# EAGLE board charlie (EAGLE 6.4)
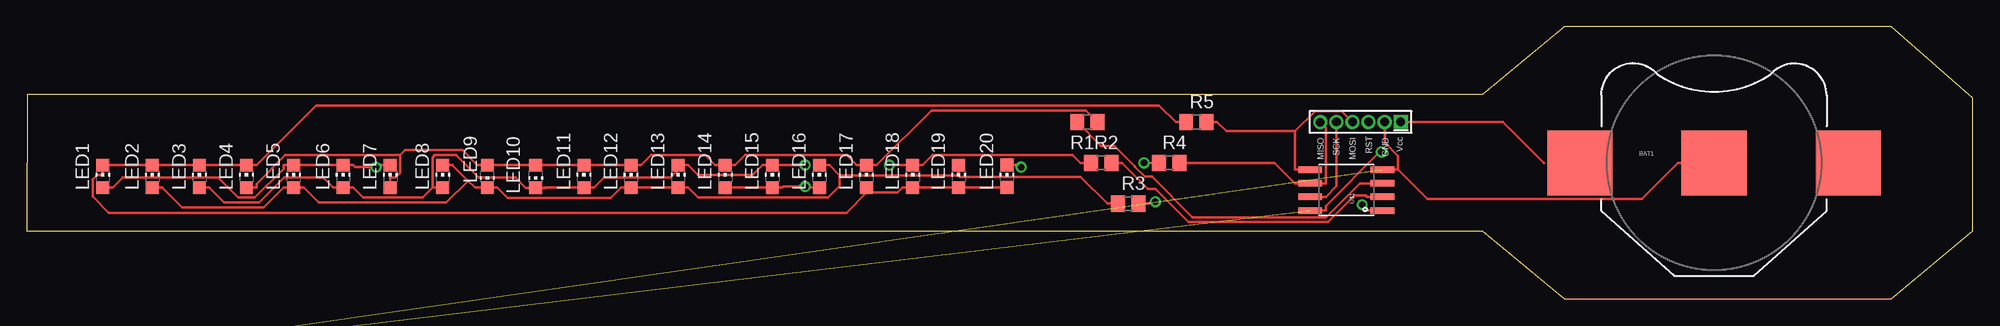
[diagram p0: board, top side]
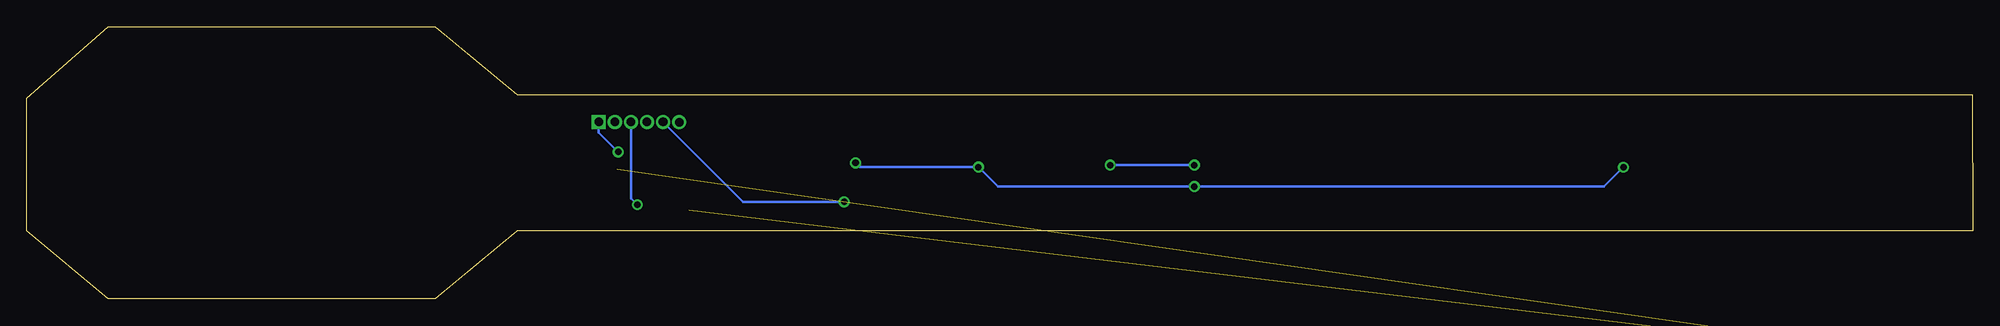
[diagram p1: board, bottom side, seen from below]

Size 181.41 x 25.4 mm. Coordinates in mm from the lower left corner, seen from the top.
Outline: 0,6.35 135.71,6.35 143.33,0 173.81,0 181.41,6.35 181.41,18.72 173.81,25.4 143.33,25.4 135.71,19.05 0.02,19.05 0,6.35
Copper layers (1*16): Top 0.035mm / dielectric 1.5mm / Bottom 0.035mm
Design rules "default": minimum track width 10mil, minimum drill 24mil, track to track 8mil, track to pad 8mil, pad to pad 8mil, via to via 8mil, smd to smd 8mil, copper to edge 40mil, drill to drill 8mil, minimum pad ring 10mil, minimum via ring 8mil, stop-mask expansion 4mil, vias tented up to drill 0mil, thermal gap 10mil

## Footprints (pad centres in the part's own frame; a part is rotated, then mirrored left to right if it is on the bottom)
BATTCON_20MM = smd 6.07 x 6.07: 1 -12.5,0; 2 0,0; 3 12.5,0
CHIP-LED0805 = smd 1.2 x 1.2: A 0,-1.05; C 0,1.05
SC75_INFINEON = smd 0.4 x 0.65: 1 -0.5,-0.575; 2 0,0.575; 3 0.5,-0.575
R0805 = smd 1.3 x 1.5: 1 -0.95,0; 2 0.95,0
SO08-EIAJ = smd 0.61 x 2.21: 1 -1.905,-3.378; 2 -0.635,-3.378; 3 0.635,-3.378; 4 1.905,-3.378; 5 1.905,3.353; 6 0.635,3.353; 7 -0.635,3.353; 8 -1.905,3.353
AVR_MINI_PROG = drill 0.8 pad 1.27 square: 1 0,0 | drill 0.8 pad 1.27: 2 1.5,0; 3 3,0; 4 4.5,0; 5 6,0; 6 7.5,0.01

## Placement (x,y rotation side)
BAT1  cr2032  [BATTCON_20MM]  157.3,12.7 0 top
LED1  [CHIP-LED0805]  7.08,11.43 0 top
LED2  [CHIP-LED0805]  11.7,11.43 0 top
LED3  [CHIP-LED0805]  16.09,11.43 0 top
LED4  [CHIP-LED0805]  20.48,11.43 0 top
LED5  [CHIP-LED0805]  24.87,11.43 0 top
LED6  [CHIP-LED0805]  29.49,11.43 0 top
LED7  [CHIP-LED0805]  33.88,11.43 0 top
LED8  [CHIP-LED0805]  38.77,11.43 0 top
LED9  [CHIP-LED0805]  42.94,11.43 180 top
LED10  [CHIP-LED0805]  47.44,11.42 180 top
LED11  [CHIP-LED0805]  51.94,11.43 0 top
LED12  [CHIP-LED0805]  56.33,11.43 0 top
LED13  [CHIP-LED0805]  60.72,11.43 0 top
LED14  [CHIP-LED0805]  65.11,11.43 0 top
LED15  [CHIP-LED0805]  69.5,11.43 0 top
LED16  [CHIP-LED0805]  73.89,11.43 0 top
LED17  [CHIP-LED0805]  78.28,11.43 0 top
LED18  [CHIP-LED0805]  82.59,11.43 0 top
LED19  [CHIP-LED0805]  86.87,11.43 0 top
LED20  [CHIP-LED0805]  91.38,11.44 0 top
Q1  BSA223SP  [SC75_INFINEON]  2.54,-5.23 0 top  (outside the outline)
R1  3  [R0805]  98.88,16.51 180 top
R2  3  [R0805]  100.15,12.7 0 top
R3  3  [R0805]  102.69,8.89 0 top
R4  3  [R0805]  106.5,12.7 0 top
R5  3  [R0805]  109.04,16.51 0 top
U$1  ATTINY45  [SO08-EIAJ]  123.01,10.16 90 top
U$3  AVR_MINI_PROGSMD  [AVR_MINI_PROG]  128.09,16.51 180 top

## Library data of the parts
BAT1 U$1 U$3 = SparkFun
LED1-LED20 = led
Q1 = transistor-fet
R1-R5 = rcl

## Nets
2.8V: Q1.3 U$1.8 U$3.1
GND: BAT1.2 Q1.1 U$1.4 U$3.2
LEDCONTROL0: LED1.C LED2.C LED3.C LED4.C LED17.A LED18.A LED19.A LED20.A R5.1
LEDCONTROL1: LED1.A LED5.C LED6.C LED7.C LED14.A LED15.A LED16.A LED20.C R4.1
LEDCONTROL2: LED2.A LED5.A LED8.C LED9.C LED12.A LED13.A LED16.C LED19.C R3.1
LEDCONTROL3: LED3.A LED6.A LED8.A LED10.C LED11.A LED13.C LED15.C LED18.C R2.1
LEDCONTROL4: LED4.A LED7.A LED9.A LED10.A LED11.C LED12.C LED14.C LED17.C R1.1
N$1: R5.2 U$1.5 U$3.4
N$2: R4.2 U$1.6 U$3.6
N$3: R3.2 U$1.7 U$3.5
N$4: R2.2 U$1.2
N$6: R1.2 U$1.3
N$7: BAT1.1
RESET: U$1.1 U$3.3

## Tracks (layer width: path | path; a pad name or v marks a point on that pad's centre or on a via)
2.8V  (via drill 0.61 pad 1.02)  (1 unrouted)
  Top 0.254: U$3.1 137.62,16.51 141.44,12.7 | U$1.8 121.09,8.25 121.09,8.7 126.11,13.72 v126.28,13.72
  Bottom 0.254: U$3.1 128.09,15.53 v126.28,13.72
GND  (1 unrouted)
  Top 0.254: 127.82,12.06 130.55,9.33 150.57,9.33 153.94,12.7 BAT1.2 | 127.82,12.06 127.82,13.36 126.59,14.59 U$3.2 | U$1.4 127.82,12.06
LEDCONTROL0
  Top 0.254: 78.28,9.91 76.41,8.04 7.66,8.04 6.15,9.55 6.15,11.13 6.57,11.55 7.08,11.55 LED1.C LED2.C LED3.C LED4.C 21.41,12.48 26.98,18.05 105.57,18.05 107.11,16.51 R5.1 | LED20.A 90.44,10.38 LED19.A LED18.A 81.66,10.38 81.19,9.91 78.28,9.91 | LED17.A 78.28,9.91
LEDCONTROL1  (via drill 0.61 pad 1.02)
  Top 0.254: LED7.C 32.95,12.48 32.76,12.29 v32.55,12.29 30.61,12.29 30.42,12.48 LED6.C LED5.C 23.94,12.48 23.94,12.13 21.26,9.45 19.72,9.45 17.86,11.31 8.94,11.31 8.01,10.38 LED1.A | LED14.A LED15.A 70.43,10.38 70.53,10.48 v72.56,10.48 72.86,10.48 72.96,10.38 LED16.A | LED20.C 91.84,12.48 92.31,12.48 92.49,12.3 v92.69,12.3 | R4.1 v104.15,12.7
  Bottom 0.254: v32.55,12.29 34.36,10.48 v72.56,10.48 90.87,10.48 v92.69,12.3 103.75,12.3 v104.15,12.7
LEDCONTROL2
  Top 0.254: 75.77,11.53 74.82,12.48 LED16.C | 86.87,11.53 75.77,11.53 | 75.77,11.53 75.77,10.54 74.67,9.45 62.58,9.45 61.65,10.38 LED13.A LED12.A 55.4,10.38 54.44,9.42 44.82,9.42 43.87,10.38 LED9.C 42.01,10.38 41.78,10.38 41.14,11.02 | 86.87,11.53 86.87,11.66 LED19.C | 86.87,11.53 87,11.4 98.25,11.4 100.76,8.89 R3.1 | 41.14,11.02 39.11,8.99 27.19,8.99 25.8,10.38 LED5.A 23.94,10.38 22.08,8.52 14.49,8.52 12.63,10.38 LED2.A | 41.14,11.02 39.7,12.46 39.7,12.48 LED8.C
LEDCONTROL3  (via drill 0.61 pad 1.02)
  Top 0.254: 61.19,12.48 60.02,11.31 53.8,11.31 52.87,10.38 LED11.A 48.38,10.38 48.37,10.38 47.91,10.38 LED10.C 46.51,10.38 45.57,11.31 42.11,11.31 40.01,13.41 38.03,13.41 37.84,13.22 37.84,10.38 | 61.19,12.48 61.65,12.48 62.58,11.55 67.64,11.55 68.57,12.48 LED15.C v72.56,12.48 | LED13.C 61.19,12.48 | R2.1 98.22,12.7 97.5,13.41 84.46,13.41 83.52,12.48 LED18.C v80.4,12.48 | 37.84,10.38 36.91,9.45 31.35,9.45 30.42,10.38 LED6.A 28.56,10.38 27.63,11.31 23.99,11.31 21.68,8.99 18.41,8.99 17.02,10.38 LED3.A | LED8.A 37.84,10.38
  Bottom 0.254: v80.4,12.48 v72.56,12.48
LEDCONTROL4
  Top 0.254: R1.1 98.75,17.59 84.32,17.59 79.21,12.48 LED17.C 77.35,12.48 76.42,13.41 66.97,13.41 66.04,12.48 LED14.C 64.18,12.48 63.25,13.41 58.19,13.41 57.26,12.48 LED12.C LED11.C 48.38,12.48 48.37,12.47 LED10.A 43.87,12.47 43.87,12.48 LED9.A 42.01,12.48 40.61,13.88 35.27,13.88 34.81,13.42 | 34.81,13.42 24.1,13.42 21.41,10.73 21.41,10.38 LED4.A | 34.81,13.42 34.81,11.73 34.39,11.31 33.88,11.31 LED7.A
N$1
  Top 0.254: 118.22,15.65 111.83,15.65 110.97,16.51 R5.2 | U$3.4 122.55,17.55 120.12,17.55 118.22,15.65 | 118.22,15.65 118.22,12.06 U$1.5
N$2
  Top 0.254: R4.2 108.43,12.7 116.32,12.7 118.22,10.79 U$1.6 121.09,10.79 121.09,16 U$3.6
N$3  (via drill 0.61 pad 1.02)
  Top 0.254: R3.2 104.62,8.89 104.79,9.06 v105.21,9.06 | U$1.7 121.09,9.53 122.09,10.52 U$3.5
  Bottom 0.254: U$3.5 114.64,9.06 v105.21,9.06
N$4
  Top 0.254: U$1.2 124.95,9.53 124.84,9.63 123.78,9.63 121.3,7.16 108.32,7.16 105.22,10.26 104.52,10.26 102.08,12.7 R2.2
N$6
  Top 0.254: R1.2 100.15,14.29 101.39,14.29 103.31,12.37 103.31,12.33 104.22,11.42 104.89,11.42 108.69,7.62 121.11,7.62 124.29,10.79 U$1.3
RESET  (via drill 0.61 pad 1.02)
  Top 0.254: v124.5,8.79 124.5,8.71 124.95,8.25 U$1.1
  Bottom 0.254: U$3.3 125.09,9.38 v124.5,8.79

## Text on the board
tPlace: SCK | RST | Vcc | MISO | MOSI | GND